# Altium PCB Current Sensor Board R2.PcbDoc
Units mm, origin at the board's own origin, x right, y up, seen from the top; angles counter-clockwise.
Board outline 66.55 x 60.71 mm, 2 copper layers (Top Layer, Bottom Layer); 32 components, 26 nets, 102 pads, 2 vias.
Unrouted connection lines stored in the file: 49.
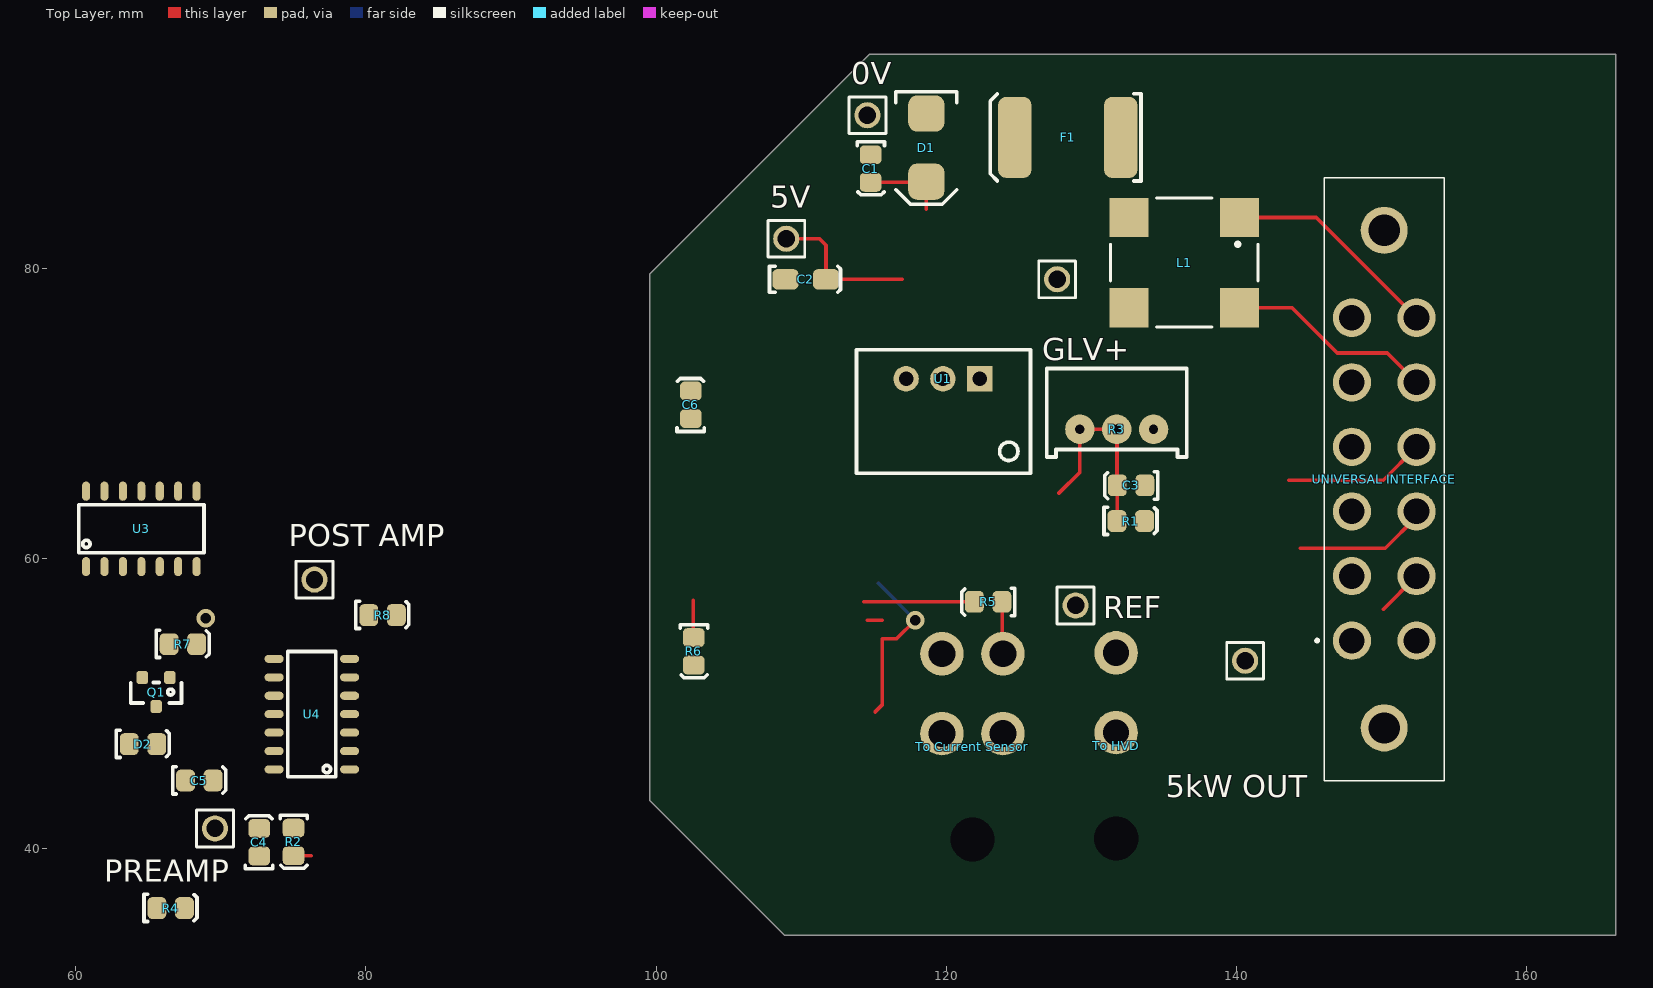
[diagram p0: Top Layer view]
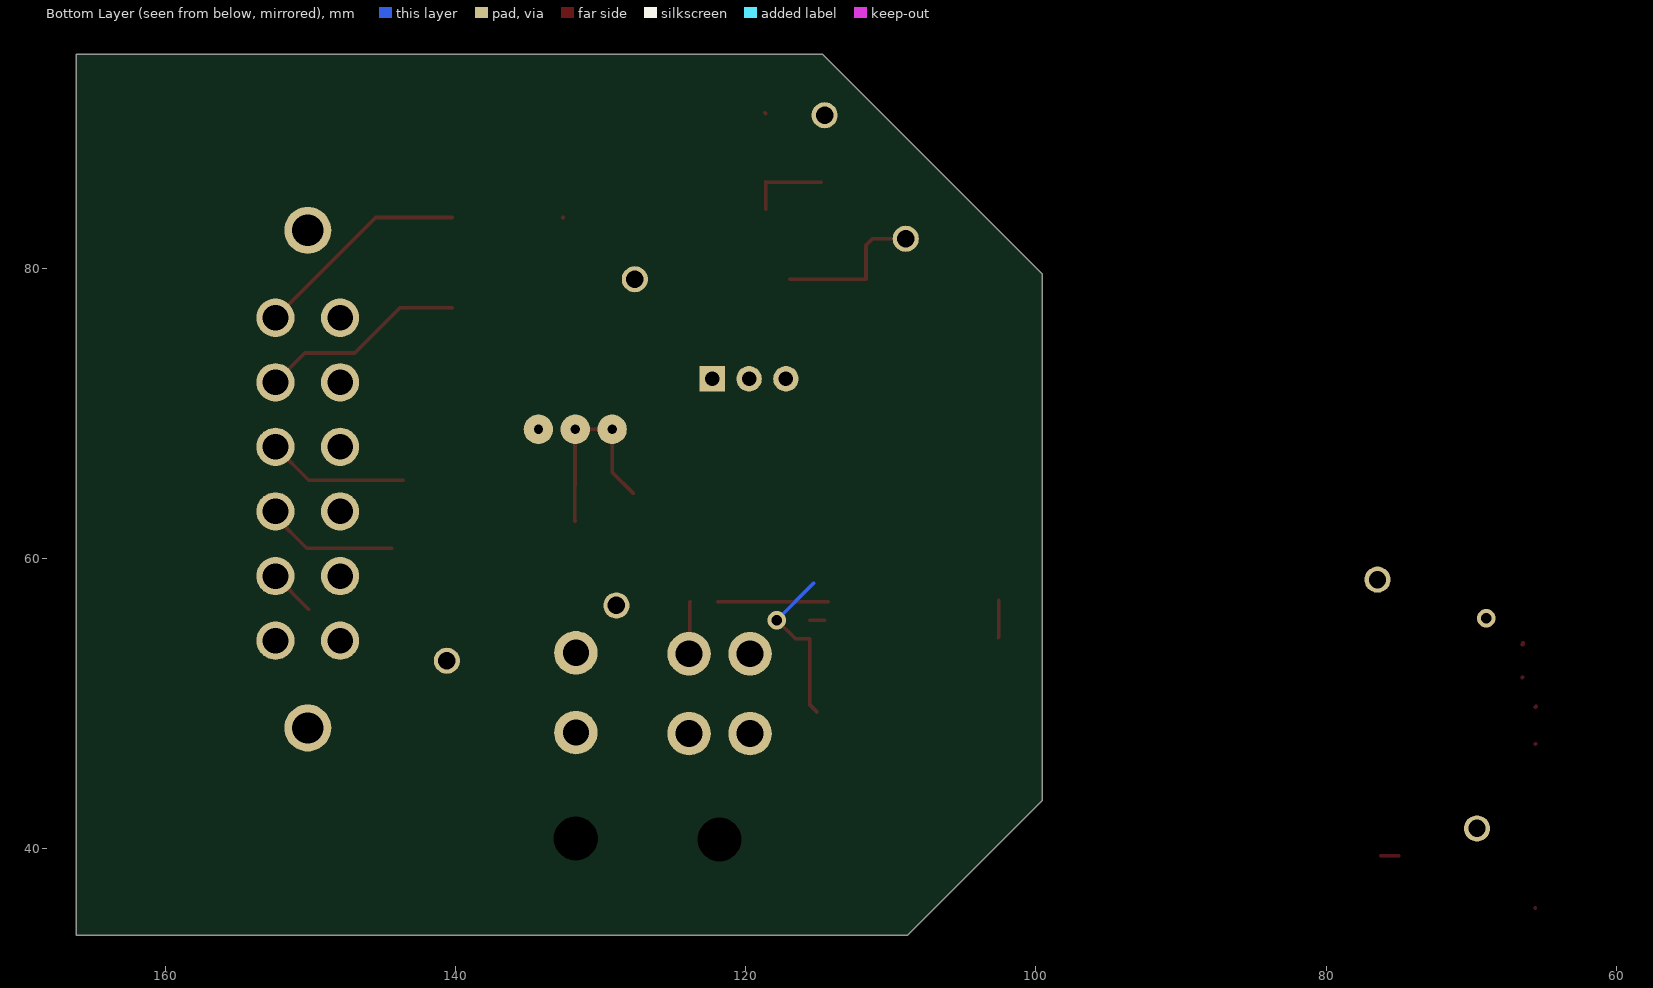
[diagram p1: Bottom Layer view, seen from below]

## Layer stack, top to bottom
Top Solder: solder mask 0.0102, Solder Resist, Dk 3.5
Top Layer: signal copper 0.0356
Dielectric 1: dielectric 0.32, FR-4, Dk 4.8
Bottom Layer: signal copper 0.0356
Bottom Solder: solder mask 0.0102, Solder Resist, Dk 3.5

## Board outline
99.568,43.307 108.839,34.036 166.116,34.036 166.116,94.742 114.681,94.742 99.568,79.629

## Design rules (kind name [scope] priority, off if disabled: settings)
Clearance [All] p1: gap=0.254 ignorepadtopadclearanceinfootprint=FALSE except(0: Arc-Hole Track-Hole SMDPad-Hole THPad-Hole Via-Hole Fill-Hole Poly-Hole Region-Hole Text-Hole)
PolygonConnect [All] p1: connectstyle=Relief reliefconductorwidth=0.254 reliefentries=4 polygonreliefangle="90 Angle" airgapwidth=0.254
RoutingVias [All] p1: holewidth=0.711 width=1.27 viastyle="Through Hole" minholewidth=0.711 minwidth=1.27 maxholewidth=0.711 maxwidth=1.27
SolderMaskExpansion [All] p1: expansion=0.102 istentingtop=FALSE
Width [All] p1: maxlimit=0.254 minlimit=0.254 preferedwidth=0.254
30 further rules are at their usual default settings.

## Components (designator, comment, footprint, x,y, rotation, side; value= is the part's Value field where it differs from the comment)
0V "0mm" "TH Test Point" 114.554,90.551 r0 top
"5kW OUT" "0mm" "TH Test Point" 140.589,52.959 r90 top
5V "0mm" "TH Test Point" 108.966,82.042 r0 top
C1 "10uF" 0805 114.808,86.868 r270 top
C2 "22uF" 1206 111.506,79.248 r0 top
C3 "100nF" 0805 132.715,65.024 r180 top
C4 "100nF" 0805 72.618,40.464 r90 top
C5 "100nF" 0805 68.526,44.73 r0 top
C6 "100nF" 0805 102.362,70.612 r90 top
D1 "SD560BTR" "SMB Diode" 118.618,90.424 r270 top
D2 "Blue" "0805 LED" 64.643,47.244 r0 top
F1 "0ZCF0200AF2C" 2920 132.014,89.027 r180 top
GLV+ "0mm" "TH Test Point" 127.635,79.248 r90 top
L1 "744272121" WE-SL5 136.398,80.391 r180 top
"POST AMP" "0mm" "TH Test Point" 76.454,58.547 r90 top
PREAMP "0mm" "TH Test Point" 69.596,41.402 r90 top
Q1 "2N7002K" "ON SOT-23 MOSFET" 65.532,50.8 r180 top
R1 "10k" 0805 132.715,62.611 r0 top
R2 "1k" 0805 75.031,40.459 r270 top
R3 "10K (Var)" "B 3296" 131.826,69.469 r0 top
R4 "100R" 0805 66.548,35.941 r0 top
R5 "1k" 0805 122.863,56.997 r180 top
R6 "1.5k" 0805 102.616,53.594 r270 top
R7 "3k" 0805 67.388,54.128 r0 top
R8 "1M" 0805 81.153,56.134 r0 top
REF "0mm" "TH Test Point" 128.905,56.769 r0 top
"To Current Sensor" "39300040" 39300040 123.893,47.94 r0 top
"To HVD" "39300020" 39300020 131.699,48.006 r0 top
U1 "R-78C5.0-1.0" "RECOM 3-SIP" 122.301,72.39 r180 top
U3 "LMV339IDR" "TI 14-SOIC" 79.756,56.843 r0 top
U4 "LM324D" "TI 14-SOIC" 81.467,64.516 r90 top
"UNIVERSAL INTERFACE" "DTF13-12PA-G003" DTF1312PAG003 147.95,54.346 r90 top

## Footprints (in the part's own frame and the unit in brackets; to place one, negate y for a bottom-side part, rotate by r counter-clockwise, add the part's x,y. Pads: shape width x height; smd on the part's side, far side on the other; paste and mask are expansions set on the pad)
0805 [mm]
  rrect50% 1.3x1.5 smd: 1(-0.962,-0.026) 2(0.938,-0.026)
  silkscreen extent -1.85,-0.95 1.8,0.93, body extent -1,-0.65 1,0.66, height 0.73
"0805 LED" [mm]
  rrect50% 1.3x1.5 smd: A(-0.962,-0.026) K(0.938,-0.026)
  silkscreen extent -1.85,-0.95 1.8,0.93, body extent -1.1,-0.62 0.9,0.62, height 1
1206 [mm]
  rrect50% 1.8x1.4 smd: 1(-2.6,0) 2(0.2,0)
  silkscreen extent -3.7,-0.9 1.2,0.9, body extent -2.9,-0.9 0.5,0.9, height 1.85
2920 [mm]
  rrect50% 2.3x5.6 smd: 1(0,0) 2(7.3,0)
  silkscreen extent -1.4,-3 9,3, body extent -0.34,-2.81 7.64,2.81, height 1.14
39300020 [mm]
  round 3 hole 1.8: 1(0,0) 2(0,5.5)
  round 1.524 hole 3.05: ""(0,-7.3)
  body extent -2.7,-13.97 3.1,5.97, height 11.4
39300040 [mm]
  round 3 hole 1.85: 1(0,0) 2(0,5.5) 3(-4.2,0) 4(-4.2,5.5)
  round 1.524 hole 3.05: ""(-2.1,-7.3)
  body extent -6.9,-13.87 3.1,6.07, height 11.4
"B 3296" [mil]
  round 80 hole 25.2: 1(-103.39,-22) 2(-3.39,-22) 3(96.61,-22)
  silkscreen extent -193,-97 187,143, body extent -191,-97 184,143, height 455
DTF1312PAG003 [mm]
  round 2.643 hole 1.762: 1(0,0) 2(4.45,0) 3(8.9,0) 4(13.35,0) 5(17.8,0) 6(22.25,0) 7(0,-4.45) 8(4.45,-4.45) 9(8.9,-4.45) 10(13.35,-4.45) 11(17.8,-4.45) 12(22.25,-4.45)
  round 3.24 hole 2.16: MH1(-6.02,-2.225) MH2(28.27,-2.225)
  silkscreen extent -9.66,-6.36 31.92,2.5, body extent -9.66,-32.38 31.92,1.91, height 23.13
"ON SOT-23 MOSFET" [mm] "NUP2105L"
  rrect50% 0.8x0.9 smd: D(0,1) G(-0.95,-1) S(0.95,-1)
  silkscreen extent -1.75,-0.66 1.75,0.75, body extent -1.5,-1.27 1.5,1.28, height 1
"RECOM 3-SIP" [mm] "12 to 42 Vdc In, 9 Vdc Out"
  rect 1.75x1.75 hole 1: 1(0,0)
  round 1.75 hole 1: 2(2.54,0) 3(5.08,0)
  silkscreen extent -3.5,-2 8.5,6.5, body extent -3.26,-2.02 8.34,6.48, height 11.41
"SMB Diode" [mm]
  rrect50% 2.5x2.5 smd: A(-0.25,0) K(4.45,0)
  silkscreen extent -1.75,-2.1 6,2.1, body extent -0.69,-1.97 4.9,1.97, height 2.5
"TH Test Point" [mm]
  round 1.8 hole 1.2: 1(0,0)
  silkscreen extent -1.27,-1.27 1.27,1.27
"TI 14-SOIC" [mil]
  oval 22x52 smd: 1(-750,102.36) 2(-700,102.36) 3(-650,102.36) 4(-600,102.36) 5(-550,102.36) 6(-500,102.36) 7(-450,102.36) 8(-450,307.09) 9(-500,307.09) 10(-550,307.09) 11(-600,307.09) 12(-650,307.09) 13(-700,307.09) 14(-750,307.09)
  silkscreen extent -770,140 -430,270, body extent -770,86 -430,323, height 69
WE-SL5 [mm] "SMD Inductor, Body 9.0 x 10.3 mm"
  rect 2.7x2.7 smd: 1(-3.81,-3.11) 2(3.81,-3.11) 3(3.81,3.11) 4(-3.81,3.11)
  silkscreen extent -5.08,-4.44 5.08,4.44, body extent -5,-4.35 5,4.35, height 6.5

## Part data
0V "5kW OUT" 5V GLV+ "POST AMP" PREAMP REF: library part "TH Test Point", Angle=0, Contact=NA, Flange=No, Part Number="TH Test Point", Pitch=0mm, Positions=1, Row Spacing=0mm
C1: library part GRM21BR6YA106KE43L, Digikey Part Number=490-10514-6-ND, Manufacturer=muRata, Rated Voltage=50V, Tolerance=10%, Material=X5R, Part Number=GRM21BR6YA106KE43L
C2: library part CC1206MKX5R7BB226, Digikey Part Number=311-1997-2-ND, Manufacturer=YAGEO, Rated Voltage=16V, Tolerance=20%, Material=Ceramic, Part Number=CC1206MKX5R7BB226
C3 C4 C5 C6: library part GCM21BR71E104KA37L, Manufacturer=muRata, Rated Voltage=25V, Tolerance=10%, Material=X7R, Part Number=GCM21BR71E104KA37L
D1: "1.2V_F 600V 5A SMB", Digikey Part Number=1655-1530-2-ND, Manufacturer="SMC Diode Solutions", Digikey Link=https://www.digikey.com/product-detail/en/smc-diode-solutions/SD560BTR/1655-1530-2-ND/6022620, Part Number=SD560BTR
D2: library part SML-MN2BCTT86C, "LED BLUE CLEAR 2012 SMD", Digikey Part Number=846-1207-1-ND, Manufacturer="ROHM Semiconductor", Colour=Blue, Digikey Link=https://www.digikey.com/product-detail/en/rohm-semiconductor/SMLMN2BCTT86C/846-1207-1-ND/6057239, Part Number=SML-MN2BCTT86C
F1: "SMD 24V 2A Fuse", Digikey Part Number=507-1749-2-ND, Manufacturer="Bel Fuse Inc", Digikey Link=https://www.digikey.com/product-detail/en/bel-fuse-inc/0ZCF0200AF2C/507-1749-2-ND/4156090, Part Number=0ZCF0200AF2C
L1: library part CMP-00010-1, "CMC 120UH 2.5A 2LN 460 OHM SMD", Case/Package=SMD/SMT, Current=2.5A, DC Resistance (DCR)=25mR, Inductance=120uH, Inductance Tolerance=40%, Max Current Rating=3A, Max Operating Temperature=125°C, Min Operating Temperature=-40°C, Package Quantity=1, Self Resonant Frequency=100kHz, Voltage Rating=80V, Core Material=Ferrite, Current Rating=2.5A, Depth=8.7mm, Height=6.5mm, Impedance=460R, Lead Free="Lead Free", Length=0.394inch, Max DC Current=2.5A, Mount="Surface Mount", Number of Lines=2, Number of Pins=4, Packaging="Tape and Reel", REACH SVHC="No SVHC", Resistance=25mR, RoHS Compliant=Yes, Series=WE-SL5, Termination=SMD/SMT, Test Frequency=100kHz, Tolerance=40%, Voltage Rating (DC)=80V, Weight=0.026103oz, Width=0.343inch
Q1: "60V 380mA, NFET MOSTFET (Small Signal)", Digikey Part Number=2N7002KCT-ND, Manufacturer="ON Semiconductor", Digikey Link=https://www.digikey.com/product-detail/en/on-semiconductor/2N7002K/2N7002KCT-ND/2060375, LatestRevisionDate=29-May-2009, LatestRevisionNote="IPC-7351 Footprint Added.", PackageDescription="4-Pin SOT-343 Package 1.3 mm Pitch, 2.1 mm Lead Span", PackageReference=SOT-343, PackageVersion=Sep-2000, Part Number=2N7002K, Published=24-Mar-1999, Publisher="Altium Limited", Qty=30
R1: library part RC0805FR0710KL, Manufacturer=YAGEO, Rated Voltage=0.125W, Tolerance=0.01, Material=FR-07, Part Number=RC0805FR0710KL
R2 R5: library part RC0805FR071KL, Manufacturer=YAGEO, Rated Voltage=0.125W, Tolerance=0.01, Material=FR-07, Part Number=RC0805FR071KL
R3: library part 3296W-1-103LF, Digikey Part Number=3296W-103LF-ND, Manufacturer="Bournes Inc", Rated Voltage=0.5W, Tolerance=0.1, Part Number=3296W-1-103LF
R4: library part RC0805FR07100RL, Manufacturer=YAGEO, Rated Voltage=0.125W, Tolerance=0.01, Material=FR-07, Part Number=RC0805FR07100RL
R6: library part RC0805FR071K5L, Manufacturer=YAGEO, Rated Voltage=0.125W, Tolerance=0.01, Material=FR-07, Part Number=RC0805FR071K5L
R7: library part RC0805FR073KL, Manufacturer=YAGEO, Rated Voltage=0.125W, Tolerance=0.01, Material=FR-07, Part Number=RC0805FR073KL
R8: library part RC0805FR071ML, Digikey Part Number=311-1.00MCRCT-ND, Manufacturer=YAGEO, Rated Voltage=0.125W, Tolerance=0.01, Material=FR-07, Part Number=RC0805FR071ML
"To Current Sensor": Digikey Part Number=WM21352-ND, Angle=90, Contact=Tin, Flange=No, Part Number=39300040, Pitch=4.2mm, Positions=4, Row Spacing=5.5mm
"To HVD": Digikey Part Number=WM21351-ND, Angle=90, Contact=Tin, Flange=No, Part Number=39300020, Pitch=4.2mm, Positions=2, Row Spacing=5.5mm
U1: "CONV DC/DC 1A 5V OUT SIP VERT", Digikey Part Number=945-1395-5-ND, Manufacturer=Recom, Digikey Link=https://www.digikey.com.au/product-detail/en/recom-power/R-78C5.0-1.0/945-1395-5-ND/2652148, Isolation=Non-Isolated, Part Number=R-78C5.0-1.0
U3: "Comparator General Purpose Open Collector 14-SOIC", Digikey Part Number=296-6611-2-ND, Manufacturer="Texas Instruments", Digikey Link=https://www.digikey.com/product-detail/en/texas-instruments/LMV339MTX-NOPB/296-35446-1-ND/3739150, Part Number=LMV339IDR
U4: "IC OPAMP GP 4 CIRCUIT 14SOIC", Digikey Part Number=296-1390-5-ND, Manufacturer="Texas Instruments", Digikey Link=https://www.digikey.com/product-detail/en/texas-instruments/LM324D/296-1390-5-ND/277039, Part Number=LM324D
"UNIVERSAL INTERFACE": "Connector", Manufacturer_Name="TE Connectivity", Mouser Part Number=571-DTF13-12PA-G003, Datasheet Link=https://www.te.com/commerce/DocumentDelivery/DDEController?Action=showdoc&DocId=Customer+Drawing%7FDTF13-12PX-G003%7F-%7Fpdf%7FEnglish%7FENG_CD_DTF13-12PX-G003_-.pdf%7FDTF13-12PA-G003, Height=23.01mm, Manufacturer_Part_Number=DTF13-12PA-G003, Mouser Price/Stock=https://www.mouser.co.uk/ProductDetail/TE-Connectivity-DEUTSCH/DTF13-12PA-G003?qs=cgQJD%2FpJz0zeSgV%2FZpdzbg%3D%3D

## Via types
v1: diameter 1.27, hole 0.711, Top Layer to Bottom Layer, 2 vias

## Nets (pads, with @x,y where several pads share a name; then routed paths per layer and width w, separated by ;. In a path a pad name is that pad's centre, name@x,y a point inside that pad or via, vN(x,y) a via of type N, cw(c..) or ccw(c..) an arc to the next point about the centre after c; other vN are vias at no path point)
0V: 0V.1 "To Current Sensor.3" C1.1 C2.1 C3.1 C4.1 C5.1 C6.1 L1.3 Q1.S R3.3 U1.2 U3.12 U4.11
5kW: "5kW OUT.1" "UNIVERSAL INTERFACE.8" R4.2 | length 3.2
  Top Layer w0.254: 150.119,56.515 152.4,58.796
5V: 5V.1 "To Current Sensor.1" C2.2 C5.2 C6.2 R1.2 R6.2 R7.2 U1.3 U3.3 U4.4 | length 10.5
  Top Layer w0.254: 5V.1 111.252,82.042 111.706,81.588 C2.2 116.967,79.248
CAN1H: "UNIVERSAL INTERFACE.5"
CAN1L: "UNIVERSAL INTERFACE.4"
CAN2H: "UNIVERSAL INTERFACE.3"
CAN2L: "UNIVERSAL INTERFACE.2"
CAN3H: "UNIVERSAL INTERFACE.7"
CAN3L: "UNIVERSAL INTERFACE.6"
CANS: "UNIVERSAL INTERFACE.1"
GLV+: "UNIVERSAL INTERFACE.12" L1.1 | length 15.1
  Top Layer w0.254: L1.1 145.495,83.501 152.4,76.596
GLV-: "UNIVERSAL INTERFACE.11" L1.4 | length 14.3
  Top Layer w0.254: L1.4 143.826,77.281 146.939,74.168 150.378,74.168 152.4,72.146
"Green In": "To HVD.2" "UNIVERSAL INTERFACE.10" | length 9.8
  Top Layer w0.254: 143.598,65.405 150.109,65.405 152.4,67.696
"Green Out": "To HVD.1" "UNIVERSAL INTERFACE.9" | length 10
  Top Layer w0.254: 144.399,60.706 150.241,60.706 152.4,62.865 152.4,63.246
  Bottom Layer w0.254: 131.699,48.006 132.442,48.006
"High Sensitivity": "To Current Sensor.2" R5.1 | length 3.6
  Top Layer w0.254: R5.1 123.859,56.989 123.859,53.474 123.893,53.44
"Low Sensitivity": "To Current Sensor.4"
NetC1_2: C1.2 D1.K GLV+.1 U1.1 | length 5.8
  Top Layer w0.254: C1.2 118.574,85.93 D1.K 118.618,84.074
NetC3_2: C3.2 R1.1 R3.1 R3.2 REF.1 U3.4 | length 13.9
  Top Layer w0.254: 127.762,64.516 129.2,65.954 R3.1 R3.2 131.758,68.892 131.758,65.069 C3.2 131.765,65.038 131.765,62.597 R1.1
NetC4_2: C4.2 PREAMP.1 R5.2 U4.3 | length 7.6
  Top Layer w0.254: 114.3,57.023 115.57,57.023 R5.2
NetD1_A: D1.A F1.2 | length 0.1
  Top Layer w0.254: D1.A D1.A@118.676,90.732
NetD2_A: D2.A R6.1 | length 2.6
  Top Layer w0.254: 102.543,57.124 102.543,54.603 R6.1
NetD2_K: D2.K Q1.D R4.1 | length 0.1
  Top Layer w0.254: Q1.D Q1.D@65.556,49.776 ; D2.K@65.556,47.242 D2.K D2.K@65.584,47.215 ; R4.1@65.584,35.917 R4.1
NetF1_1: F1.1 L1.2 | length 0
  Top Layer w0.254: L1.2@132.584,83.505 L1.2
"NetPOST AMP_1": "POST AMP.1" R2.2 R8.1 U3.5 U4.1 | length 12.9
  Top Layer w0.254: R2.2 76.224,39.521 ; 115.086,49.427 115.57,49.911 115.57,54.483 116.586,54.483 v1(117.856,55.753)
  Bottom Layer w0.254: 115.316,58.293 v1(117.856,55.753)
NetQ1_G: Q1.G R7.1 R8.2 U3.2 | length 0.4
  Top Layer w0.254: R7.1@66.426,54.202 R7.1 R7.1@66.454,54.074 ; Q1.G@66.454,51.828 Q1.G ; v1@68.802,55.721 v1(68.961,55.88)
NetR2_1: R2.1 U4.2 | length 1
  Top Layer w0.254: 114.554,55.753 115.57,55.753
pads on no net: "To Current Sensor." "To HVD." "UNIVERSAL INTERFACE.MH1" "UNIVERSAL INTERFACE.MH2" U3.1 U3.6 U3.7 U3.8 U3.9 U3.10 U3.11 U3.13 U3.14 U4.5 U4.6 U4.7 U4.8 U4.9 U4.10 U4.12 U4.13 U4.14

## Silkscreen, mask and mechanical layers (free items; w line width, h text height)
Mechanical 1:
  lines w0.254: 99.568,43.307 99.568,79.629 114.681,94.742 162.814,94.742 166.116,94.742 166.116,34.798 166.116,34.036 134.874,34.036 108.839,34.036 99.568,43.307